# EAGLE board VIVA Blue Screen REV2 (EAGLE 6.3)
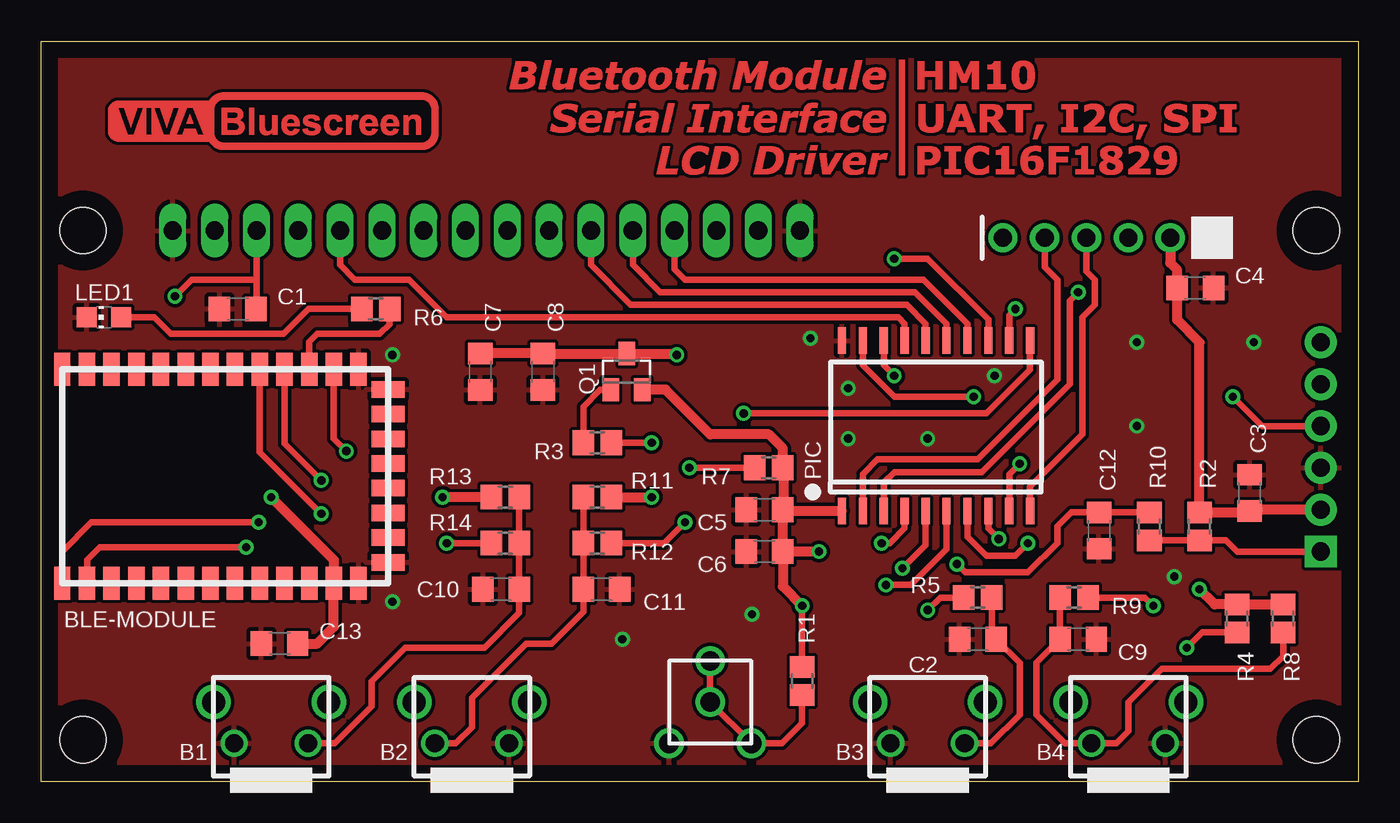
[diagram p0: board, top side]
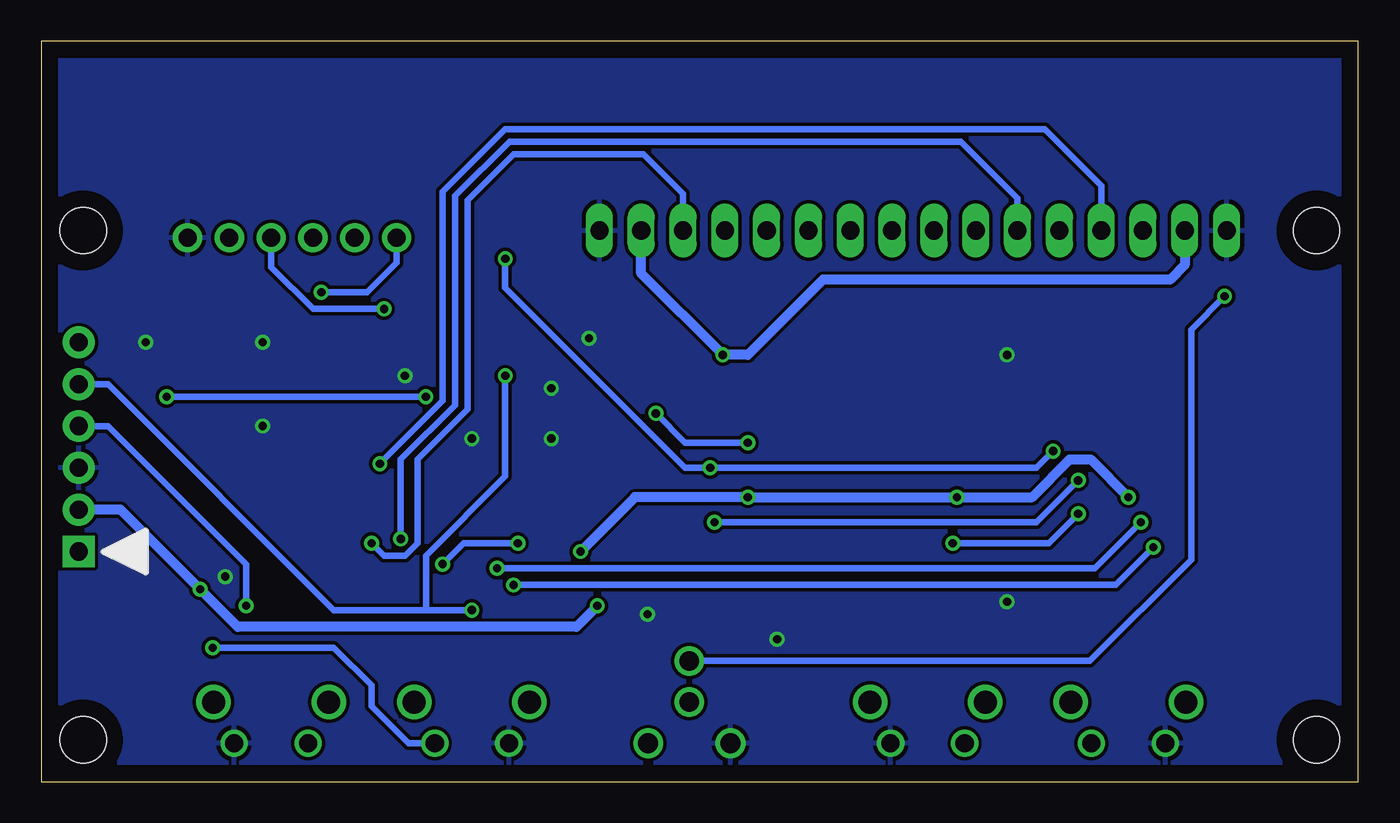
[diagram p1: board, bottom side, seen from below]

Size 80.01 x 44.96 mm. Coordinates in mm from the lower left corner, seen from the top.
Outline: 80.01,0 0,0 0,44.96 80.01,44.96 80.01,0
Copper layers (1*16): Top 0.035mm / dielectric 1.5mm / Bottom 0.035mm
Design rules "default *": minimum track width 10mil, minimum drill 24mil, track to track 8mil, track to pad 8mil, pad to pad 8mil, via to via 8mil, smd to smd 8mil, copper to edge 40mil, drill to drill 8mil, minimum pad ring 10mil, minimum via ring 8mil, stop-mask expansion 4mil, vias tented up to drill 20mil, thermal gap 10mil

## Footprints (pad centres in the part's own frame; a part is rotated, then mirrored left to right if it is on the bottom)
6MM_RA = drill 1.1: 1 -2.25,-2.5; 2 2.25,-2.5 | drill 1.4: TAB.1 -3.5,0; TAB.2 3.5,0
HM-10_EDGE = smd 2 x 1: 1 -6.5,6.34; 2 -6.5,4.84; 3 -6.5,3.34; 4 -6.5,1.84; 5 -6.5,0.34; 6 -6.5,-1.16; 7 -6.5,-2.66; 8 -6.5,-4.16; 9 -6.5,-5.66; 10 -6.5,-7.16; 11 -6.5,-8.66; 12 -6.5,-10.16; 13 -6.5,-11.66; 22 6.5,-11.66; 23 6.5,-10.16; 24 6.5,-8.66; 25 6.5,-7.16; 26 6.5,-5.66; 27 6.5,-4.16; 28 6.5,-2.66; 29 6.5,-1.16; 30 6.5,0.34; 31 6.5,1.84; 32 6.5,3.34; 33 6.5,4.84; 34 6.5,6.34 | smd 1 x 2: 14 -5.23,-13.45; 15 -3.73,-13.45; 16 -2.23,-13.45; 17 -0.73,-13.45; 18 0.77,-13.45; 19 2.27,-13.45; 20 3.77,-13.45; 21 5.27,-13.45
C0805 = smd 1.3 x 1.5: 1 -1.104,0; 2 1.104,0
PINS_6 = drill 1.1 pad 1.93 square: 1 0,0 | drill 1.1 pad 1.93: 2 2.54,0; 3 5.08,0; 4 7.62,0; 5 10.16,0; 6 12.7,0
CHIP-LED0805 = smd 1.2 x 1.2: A 0,-1.05; C 0,1.05
SOP20-NEW = smd 0.5 x 1.6: 1 -5.715,-5.152; 2 -4.445,-5.152; 3 -3.175,-5.152; 4 -1.905,-5.152; 5 -0.635,-5.152; 6 0.635,-5.152; 7 1.905,-5.152; 8 3.175,-5.152; 9 4.445,-5.152; 10 5.715,-5.152; 11 5.715,5.188; 12 4.445,5.188; 13 3.175,5.188; 14 1.905,5.188; 15 0.635,5.188; 16 -0.635,5.188; 17 -1.905,5.188; 18 -3.175,5.188; 19 -4.445,5.188; 20 -5.715,5.188
SOT23 = smd 1 x 1.4: 1 -0.95,-1.1; 2 0.95,-1.1; 3 0,1.1
R0805 = smd 1.3 x 1.5: 1 -0.85,0; 2 0.85,0
TRIMER = drill 1.2: P$1 -2.5,-2.5; P$2 0,2.5; P$3 2.5,-2.5; P$4 0,0
PCB_6 = drill 1.1 pad 1.778: P$1 0,0; P$2 0,-2.54; P$3 0,-5.08; P$4 0,-7.62; P$5 0,-10.16; P$6 0,-12.7
LCD1602 = drill 1.1 long: 1 8,33.46; 2 10.54,33.46; 3 13.08,33.46; 4 15.62,33.46; 5 18.16,33.46; 6 20.7,33.46; 7 23.24,33.46; 8 25.78,33.46; 9 28.32,33.46; 10 30.86,33.46; 11 33.4,33.46; 12 35.94,33.46; 13 38.48,33.46; 14 41.02,33.46; 15 43.56,33.46; 16 46.1,33.46 | hole 2.8: 2.54,2.54; 2.54,33.46; 77.46,33.46; 77.46,2.54

## Placement (x,y rotation side)
B1  [6MM_RA]  13.97,4.83 0 top
B2  [6MM_RA]  26.16,4.83 0 top
B3  [6MM_RA]  53.85,4.83 0 top
B4  [6MM_RA]  66.04,4.83 0 top
BLE-MODULE  HM-10  [HM-10_EDGE]  7.62,18.54 90 top
C1  4u7  [C0805]  11.94,28.7 0 top
C2  100n  [C0805]  56.9,8.64 0 top
C3  4u7  [C0805]  73.41,17.53 270 top
C4  47n  [C0805]  70.1,29.97 180 top
C5  47n  [C0805]  43.94,16.51 0 top
C6  47u  [C0805]  43.94,13.97 0 top
C7  4u7  [C0805]  26.67,24.89 90 top
C8  47n  [C0805]  30.48,24.89 90 top
C9  100n  [C0805]  62.99,8.64 180 top
C10  47n  [C0805]  27.94,11.68 0 top
C11  47n  [C0805]  34.04,11.68 180 top
C12  100n  [C0805]  64.26,15.24 90 top
C13  4u7  [C0805]  14.48,8.38 0 top
J3  PICKIT3PLAIN  [PINS_6]  77.72,13.97 90 bottom
LED1  [CHIP-LED0805]  3.81,28.19 90 top
PIC  PIC16F1829  [SOP20-NEW]  54.36,21.59 0 top
Q1  PNP  [SOT23]  35.56,24.89 0 top
R1  [R0805]  46.23,6.1 270 top
R2  10k  [R0805]  70.36,15.49 90 top
R3  100  [R0805]  33.78,20.57 180 top
R4  10k  [R0805]  72.64,9.91 270 top
R5  10k  [R0805]  56.9,11.18 0 top
R6  10k  [R0805]  20.32,28.7 0 top
R7  10k  [R0805]  44.2,19.05 180 top
R8  10k  [R0805]  75.44,9.91 270 top
R9  10k  [R0805]  62.74,11.18 180 top
R10  470  [R0805]  67.31,15.49 90 top
R11  10k  [R0805]  33.78,17.27 180 top
R12  10k  [R0805]  33.78,14.48 180 top
R13  10k  [R0805]  28.19,17.27 0 top
R14  10k  [R0805]  28.19,14.48 0 top
TM1  [TRIMER]  40.64,4.83 0 top
U$1  PINS_6SILK  [PCB_6]  71.12,33.02 270 top
U$2  VIVA_BLUESCREEN_LOGO  [VIVA_BLUESCREEN_LOGO]  4.06,38.35 0 top
U$3  VIVA_BLUESCREEN_TEXT  [VIVA_BLUESCREEN_TEXT]  28.45,36.83 0 top
X1  HD44780LCD-1602  [LCD1602]  0,0 0 top

## Library data of the parts
B1-B4 BLE-MODULE C1-C13 J3 LED1 PIC Q1 R1-R14 TM1 U$1-U$3 X1 = nolan-utsa

## Nets
BLE.RX: BLE-MODULE.2 PIC.6
BLE.SK: BLE-MODULE.23 PIC.13 R7.2
BLE.TX: BLE-MODULE.1 PIC.5
GND: B1.1 B2.2 B3.1 B4.2 BLE-MODULE.13 BLE-MODULE.14 BLE-MODULE.21 BLE-MODULE.22 C1.1 C2.1 C3.1 C4.1 C5.1 C6.1 C7.1 C8.1 C9.1 C10.1 C11.1 C12.1 C13.1 J3.3 LED1.C PIC.20 TM1.P$1 U$1.P$1 X1.1 X1.16
HM.B1: BLE-MODULE.26 R14.1
HM.B2: BLE-MODULE.25 R12.1
LCD.D4: PIC.16 X1.11
LCD.D5: PIC.15 X1.12
LCD.D6: PIC.14 X1.13
LCD.D7: PIC.7 X1.14
LCD.E: PIC.8 X1.6
LCD.RS: PIC.9 X1.4
LCD.RW: PIC.17 X1.5
LCD_+V: C7.2 C8.2 Q1.3 X1.2 X1.15
LCD_CONTRAST: C1.2 R1.2 TM1.P$2 TM1.P$3 TM1.P$4 X1.3
LCD_CONTROL: PIC.11 R3.1
LVP: J3.6
MCLR: C12.2 PIC.4 R10.2
N$1: BLE-MODULE.24 R6.2
N$3: LED1.A R6.1
N$4: Q1.1 R3.2
N$5: B3.2 C2.2 R4.2 R5.2
N$6: B2.1 C11.2 R11.2 R12.2
N$7: B1.2 C10.2 R13.2 R14.2
N$9: J3.1 R2.1 R10.1
N$10: B4.1 C9.2 R8.2 R9.2
PGC: J3.5 PIC.18 R5.1
PGD: J3.4 PIC.19 R9.1
VDD: BLE-MODULE.12 C3.2 C4.2 C5.2 C6.2 C13.2 J3.2 PIC.1 Q1.2 R1.1 R2.2 R4.1 R7.1 R8.1 R11.1 R13.1 U$1.P$2
VIVA.3: PIC.12 U$1.P$3
VIVA.4: PIC.10 U$1.P$4
VIVA.5: PIC.2 U$1.P$5
VIVA.6: PIC.3 U$1.P$6

## Tracks (layer width: path | path; a pad name or v marks a point on that pad's centre or on a via)
BLE.RX  (via drill 0.5)
  Top 0.406: PIC.6 54.99,14.1 52.83,11.94 v51.31,11.94 | v12.45,14.22 3.56,14.22 2.79,13.46 2.79,12.06 BLE-MODULE.2
  Bottom 0.406: v51.31,11.94 14.73,11.94 v12.45,14.22
BLE.SK  (via drill 0.5)
  Top 0.406: R7.2 v39.37,19.05 | v18.54,20.07 17.78,20.83 BLE-MODULE.23 | PIC.13 57.53,28.07 53.85,31.75 v51.82,31.75
  Bottom 0.406: v18.54,20.07 19.56,19.05 v39.37,19.05 40.89,19.05 51.82,29.97 v51.82,31.75
BLE.TX  (via drill 0.5)
  Top 0.406: PIC.5 53.72,14.35 v52.32,12.95 | v13.21,15.75 3.05,15.75 1.27,13.97 1.27,12.05 BLE-MODULE.1
  Bottom 0.406: v52.32,12.95 16,12.95 v13.21,15.75
GND  (via drill 0.5)
  other vias: 21.34,25.91 21.34,10.92 46.74,26.92 43.18,10.16 35.31,8.64 49.02,20.83 53.85,20.83 57.91,24.64 73.66,26.67 66.55,26.67 66.55,21.59 68.83,12.45 49.02,23.88
  pour Bottom: 80.01,0 0,0 0,44.96 80.01,44.96
  pour Top: 80.01,0 0,0 0,44.96 80.01,44.96
HM.B1  (via drill 0.5)
  Top 0.406: v17.02,16.26 13.28,19.99 BLE-MODULE.26 | R14.1 v24.64,14.48
  Bottom 0.406: v24.64,14.48 18.8,14.48 v17.02,16.26
HM.B2  (via drill 0.5)
  Top 0.406: v17.02,18.29 14.78,20.53 BLE-MODULE.25 | R12.1 37.85,14.48 v39.12,15.75
  Bottom 0.406: v39.12,15.75 19.56,15.75 v17.02,18.29
LCD.D4
  Top 0.406: PIC.16 53.72,27.81 52.58,28.96 35.81,28.96 33.4,31.37 X1.11
LCD.D5
  Top 0.406: PIC.15 54.99,27.81 53.09,29.72 37.59,29.72 35.94,31.37 X1.12
LCD.D6
  Top 0.406: X1.13 38.48,31.12 39.12,30.48 53.59,30.48 56.26,27.81 PIC.14
LCD.D7  (via drill 0.5)
  Top 0.406: PIC.7 56.26,14.86 57.4,13.72 59.18,13.72 v59.94,14.48
  Bottom 0.406: v59.94,14.48 59.18,13.72 57.91,13.72 57.15,14.48 57.15,19.56 54.1,22.61 54.1,35.31 51.31,38.1 43.43,38.1 41.02,35.69 X1.14
LCD.E  (via drill 0.5)
  Top 0.406: PIC.8 57.53,15.37 v58.17,14.73
  Bottom 0.406: v58.17,14.73 58.17,19.56 54.86,22.86 54.86,35.56 51.56,38.86 24.13,38.86 20.7,35.43 X1.6
LCD.RS  (via drill 0.5)
  Top 0.406: PIC.9 58.8,18.67 v59.44,19.3
  Bottom 0.406: v59.44,19.3 55.63,23.11 55.63,35.81 51.82,39.62 19.05,39.62 15.62,36.19 X1.4
LCD.RW
  Top 0.406: PIC.17 52.45,27.81 52.07,28.19 24.64,28.19 22.35,30.48 19.05,30.48 18.16,31.37 X1.5
LCD_+V  (via drill 0.5)
  Top 0.61: v38.61,25.91 38.52,25.99 Q1.3 C8.2 C7.2
  Bottom 0.61: X1.15 43.56,30.86 v38.61,25.91 37.08,25.91 32.51,30.48 11.43,30.48 10.54,31.37 X1.2
LCD_CONTRAST  (via drill 0.5)
  Top 0.406: C1.2 13.08,28.74 13.08,30.48 | 13.08,30.48 X1.3 | R1.2 46.23,3.56 45,2.33 TM1.P$3 TM1.P$4 TM1.P$2 | v8.13,29.46 9.14,30.48 13.08,30.48
  Bottom 0.406: TM1.P$2 16.3,7.33 10.16,13.46 10.16,27.43 v8.13,29.46
LCD_CONTROL  (via drill 0.5)
  Top 0.406: R3.1 v37.08,20.57 | v42.67,22.35 57.4,22.35 60.07,25.02 PIC.11
  Bottom 0.406: v37.08,20.57 40.89,20.57 v42.67,22.35
MCLR  (via drill 0.5)
  Top 0.406: R10.2 C12.2 62.57,16.34 61.72,15.49 61.72,14.48 59.94,12.7 56.13,12.7 v55.63,13.21 | v51.05,14.48 51.56,14.48 52.45,15.37 PIC.4
  Bottom 0.406: v55.63,13.21 54.36,14.48 v51.05,14.48
N$1
  Top 0.406: BLE-MODULE.24 16.28,26.69 16.76,27.18 20.57,27.18 21.17,27.77 R6.2
N$3
  Top 0.406: R6.1 16.26,28.7 14.73,27.18 7.87,27.18 6.86,28.19 LED1.A
N$4
  Top 0.406: R3.2 32.93,22.77 33.95,23.79 Q1.1
N$5  (via drill 0.5)
  Top 0.406: B3.2 57.7,2.33 59.44,4.06 59.44,7.2 C2.2 57.75,8.89 R5.2 | R4.2 70.52,9.06 v69.6,8.13
  Bottom 0.406: v69.6,8.13 62.23,8.13 59.94,5.84 59.94,4.57 57.7,2.33 B3.2
N$6
  Top 0.406: B2.1 25.19,2.33 26.16,3.3 26.16,5.08 29.46,8.38 30.99,8.38 32.93,10.33 C11.2 R12.2 R11.2
N$7
  Top 0.406: B1.2 17.82,2.33 20.07,4.57 20.07,6.1 22.1,8.13 26.92,8.13 29.04,10.25 C10.2 R14.2 R13.2
N$9
  Top 0.406: J3.1 72.64,13.97 71.97,14.64 R2.1 R10.1
N$10
  Top 0.406: R8.2 75.44,7.62 74.68,6.86 68.07,6.86 66.04,4.83 66.04,3.05 65.32,2.33 B4.1 62.19,2.33 60.45,4.06 60.45,7.2 C9.2 R9.2
PGC  (via drill 0.5)
  Top 0.406: R5.1 54.61,11.18 v53.85,10.41 | PIC.18 51.18,25.27 v51.82,24.64
  Bottom 0.406: v53.85,10.41 56.64,10.41 | 56.64,10.41 62.23,10.41 75.95,24.13 J3.5 | v51.82,24.64 51.82,18.54 56.64,13.72 56.64,10.41
PGD  (via drill 0.5)
  Top 0.406: R9.1 67.06,11.18 v67.56,10.67 | PIC.19 49.91,25.27 51.82,23.37 v56.64,23.37 | v72.39,23.37 74.17,21.59 J3.4
  Bottom 0.406: v67.56,10.67 67.56,13.21 75.95,21.59 J3.4 | v56.64,23.37 v72.39,23.37
VDD  (via drill 0.5)
  Top 0.406: R1.1 v46.23,10.67
  Top 0.61: J3.2 73.49,16.51 C3.2 73.33,16.34 R2.2 70.36,26.67 69,28.03 C4.2 69,31.08 68.58,31.5 U$1.P$2 | R8.1 R4.1 71.29,10.76 v70.36,11.68 | 45.12,16.44 PIC.1 | R13.1 v24.38,17.27 | v13.97,17.27 17.78,13.46 BLE-MODULE.12 17.78,9.4 16.76,8.38 C13.2 | Q1.2 37.93,23.79 40.64,21.08 44.2,21.08 45.05,20.23 R7.1 45.12,18.98 45.12,16.44 | C6.2 C5.2 45.12,16.44 | C6.2 45.05,11.85 v46.23,10.67 | R11.1 v37.08,17.27 | v47.24,13.97 C6.2
  Bottom 0.61: J3.2 75.18,16.51 v70.36,11.68 68.07,9.4 47.5,9.4 v46.23,10.67 | v47.24,13.97 43.94,17.27 v37.08,17.27 v24.38,17.27 19.81,17.27 17.53,19.56 16.26,19.56 v13.97,17.27
VIVA.3  (via drill 0.5)
  Top 0.406: PIC.12 58.8,28.32 v59.18,28.7
  Bottom 0.406: v59.18,28.7 63.5,28.7 66.04,31.24 U$1.P$3
VIVA.4
  Top 0.406: U$1.P$4 63.5,30.99 64.01,30.48 64.01,28.96 63.25,28.19 63.25,21.08 60.07,17.91 PIC.10
VIVA.5
  Top 0.406: PIC.2 49.91,18.67 50.8,19.56 56.9,19.56 61.72,24.38 61.72,30.48 60.96,31.24 U$1.P$5
VIVA.6  (via drill 0.5)
  Top 0.406: PIC.3 51.18,18.16 51.82,18.8 57.15,18.8 62.48,24.13 62.48,29.21 v62.99,29.72
  Bottom 0.406: v62.99,29.72 60.2,29.72 58.42,31.5 U$1.P$6